# EAGLE board l298n_x1 (EAGLE 5.06)
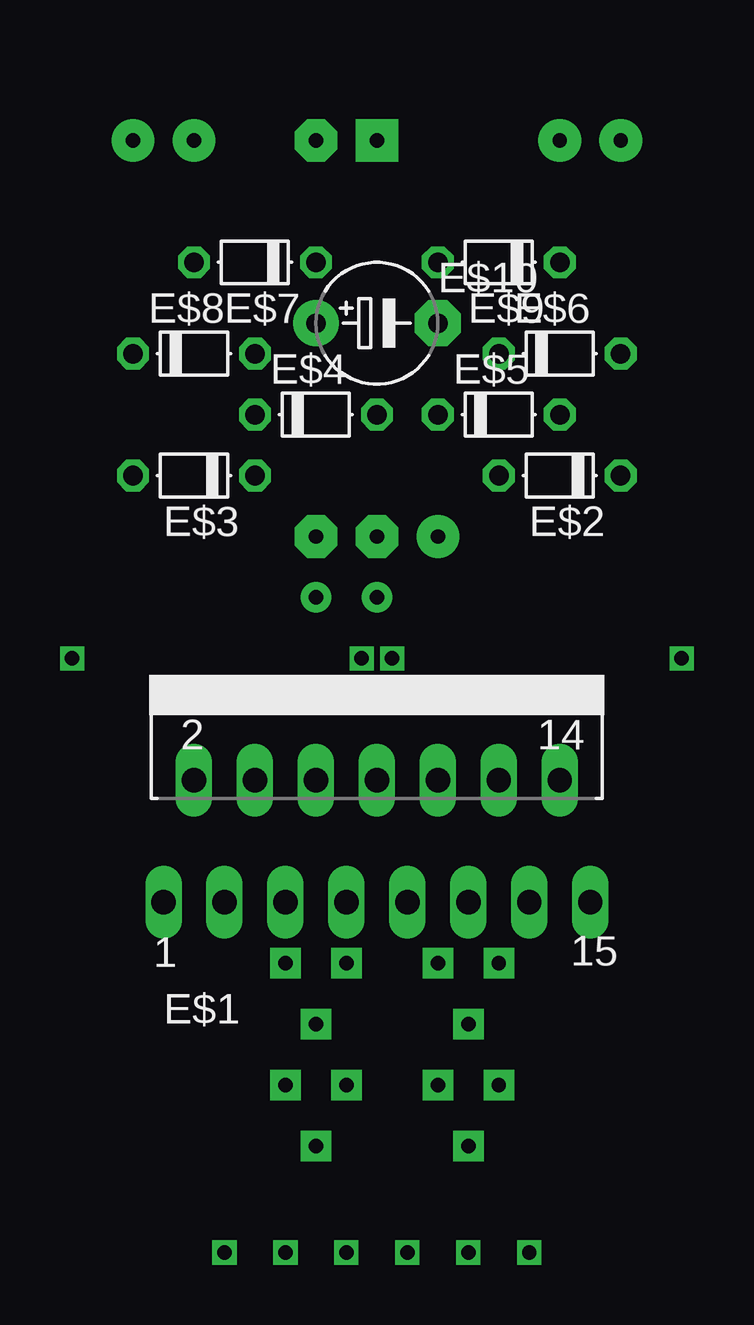
[diagram p0: board, top side]
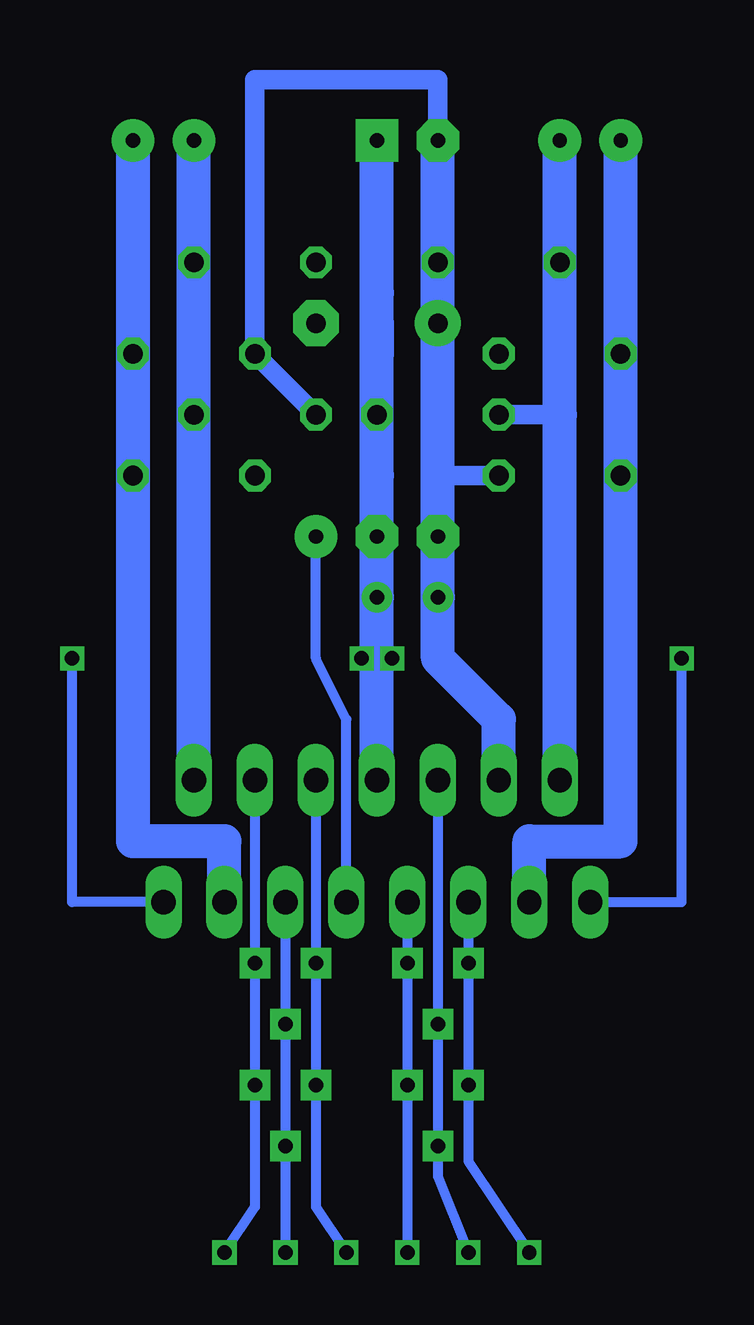
[diagram p1: board, bottom side, seen from below]

No outline drawn. Coordinates in mm, seen from the top.
Copper layers (1*16): Top 0.035mm / dielectric 1.5mm / Bottom 0.035mm
Design rules "default": minimum track width 10mil, minimum drill 24mil, track to track 8mil, track to pad 8mil, pad to pad 8mil, via to via 8mil, smd to smd 8mil, copper to edge 40mil, drill to drill 8mil, minimum pad ring 10mil, minimum via ring 8mil, stop-mask expansion 4mil, vias tented up to drill 0mil, thermal gap 10mil

## Footprints (pad centres in the part's own frame; a part is rotated, then mirrored left to right if it is on the bottom)
MULTIWATT-15 = drill 1.016 long: 1 -8.89,-7.62; 2 -7.62,-2.54; 3 -6.35,-7.62; 4 -5.08,-2.54; 5 -3.81,-7.62; 6 -2.54,-2.54; 7 -1.27,-7.62; 8 0,-2.54; 9 1.27,-7.62; 10 2.54,-2.54; 11 3.81,-7.62; 12 5.08,-2.54; 13 6.35,-7.62; 14 7.62,-2.54; 15 8.89,-7.62
D-5 = drill 0.813 octagon: A 2.54,0; C -2.54,0
E5-5 = drill 0.813 pad 1.905 round: + -2.54,0 | drill 0.813 pad 1.905 octagon: - 2.54,0

## Placement (x,y rotation side)
E$1  [MULTIWATT-15]  27.94,33.02 0 top
E$2  [D-5]  35.56,43.18 180 top
E$3  [D-5]  20.32,43.18 180 top
E$4  [D-5]  25.4,45.72 0 top
E$5  [D-5]  33.02,45.72 0 top
E$6  [D-5]  35.56,48.26 0 top
E$7  [D-5]  22.86,52.07 180 top
E$8  [D-5]  20.32,48.26 0 top
E$9  [D-5]  33.02,52.07 180 top
E$10  [E5-5]  27.94,49.53 0 top

## Library data of the parts
E$1 = ref-packages
E$2-E$9 = diode
E$10 = rcl

## Nets
GND: E$1.8
S$1: E$1.1
S$2: E$1.15
S$4: E$1.3
S$5: E$1.2 E$4.C
S$6: E$1.4 E$3.C E$6.C
S$7: E$1.14
S$8: E$1.5
S$9: E$1.6
S$10: E$1.7
S$11: E$1.12
S$12: E$1.11
S$13: E$1.10
S$14: E$1.13
S$15: E$1.9

## Tracks (layer width: path | path; a pad name or v marks a point on that pad's centre or on a via)
GND  (via drill 0.6 pad 1.27, 0.6 pad 1.78)
  Bottom 1.422: 27.94,49.53 27.94,48.26 | 27.94,49.53 27.94,50.8 | 27.94,43.18 27.94,49.53 | 27.94,43.18 27.94,49.53 | 27.94,43.18 v27.94,57.15 | 27.94,43.18 v27.94,40.64 v27.94,38.1 E$1.8
S$1  (via drill 0.6)
  Bottom 0.406: E$1.1 15.24,25.4 v15.24,35.56
S$2  (via drill 0.6)
  Bottom 0.406: E$1.15 40.64,25.4 v40.64,35.56
S$4  (via drill 0.6 pad 1.78)
  Bottom 1.422: v17.78,57.15 17.78,27.94 21.59,27.94 E$1.3
S$5  (via drill 0.6 pad 1.78)
  Bottom 0.813: 20.32,45.72 E$4.C
  Bottom 1.422: E$1.2 20.32,45.72 v20.32,57.15
S$6  (via drill 0.6 pad 1.27, 0.6 pad 1.78)
  Bottom 0.813: 30.48,45.72 E$6.C 33.02,59.69 25.4,59.69 v25.4,57.15 | 25.4,43.18 E$3.C
  Bottom 1.422: v25.4,57.15 25.4,43.18 v25.4,40.64 v25.4,38.1 25.4,35.56 22.86,33.02 E$1.4
S$7  (via drill 0.6 pad 1.78)
  Bottom 1.422: E$1.14 v35.56,57.15
S$8  (via drill 0.6, 0.6 pad 1.27)
  Bottom 0.406: E$1.5 v24.13,22.86 v24.13,17.78 24.13,14.61 v21.59,10.79
S$9  (via drill 0.6, 0.6 pad 1.27)
  Bottom 0.406: E$1.6 v25.4,20.32 v25.4,15.24 25.4,13.97 v24.13,10.79
S$10  (via drill 0.6, 0.6 pad 1.27)
  Bottom 0.406: E$1.7 v26.67,22.86 v26.67,17.78 v26.67,10.79
S$11  (via drill 0.6, 0.6 pad 1.27)
  Bottom 0.406: E$1.12 v33.02,22.86 v33.02,17.78 33.02,12.7 v34.29,10.79
S$12  (via drill 0.6, 0.6 pad 1.27)
  Bottom 0.406: E$1.11 v31.75,20.32 v31.75,15.24 v31.75,10.79
S$13  (via drill 0.6, 0.6 pad 1.27)
  Bottom 0.406: E$1.10 v30.48,22.86 v30.48,17.78 30.48,12.7 v29.21,10.79
S$14  (via drill 0.6 pad 1.78)
  Bottom 1.422: v38.1,57.15 38.1,27.94 34.29,27.94 E$1.13
S$15  (via drill 0.6 pad 1.78)
  Bottom 0.406: E$1.9 29.21,33.02 30.48,35.56 v30.48,40.64
S$16  (via drill 0.6)
  other vias: 27.3,35.56
S$17  (via drill 0.6)
  other vias: 28.57,35.56